# Altium PCB 地面站侧板开孔尺寸图1.PcbDoc
Units mm, origin at the board's own origin, x right, y up, seen from the top; angles counter-clockwise.
Board outline 168.25 x 54.25 mm, 2 copper layers (Top Layer, Bottom Layer); 18 components, 0 nets, 28 pads, 0 vias.
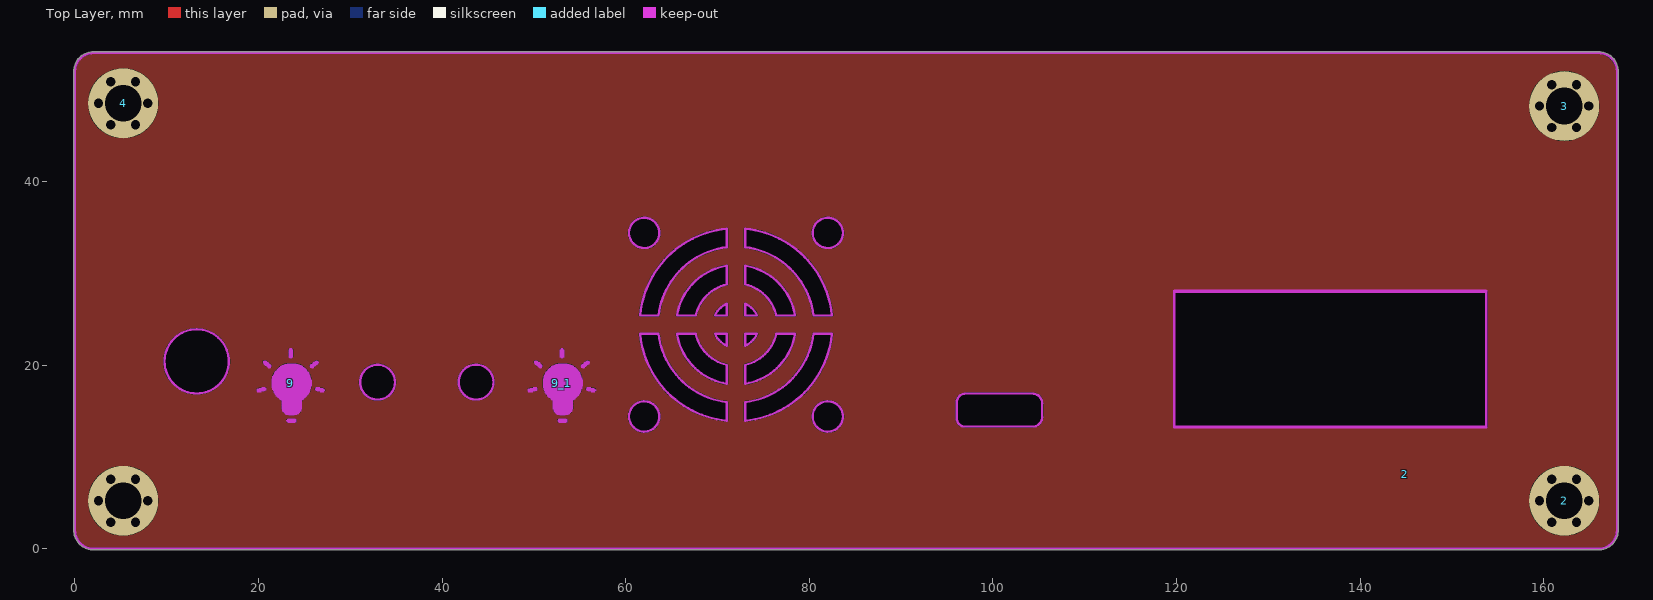
[diagram p0: Top Layer view]
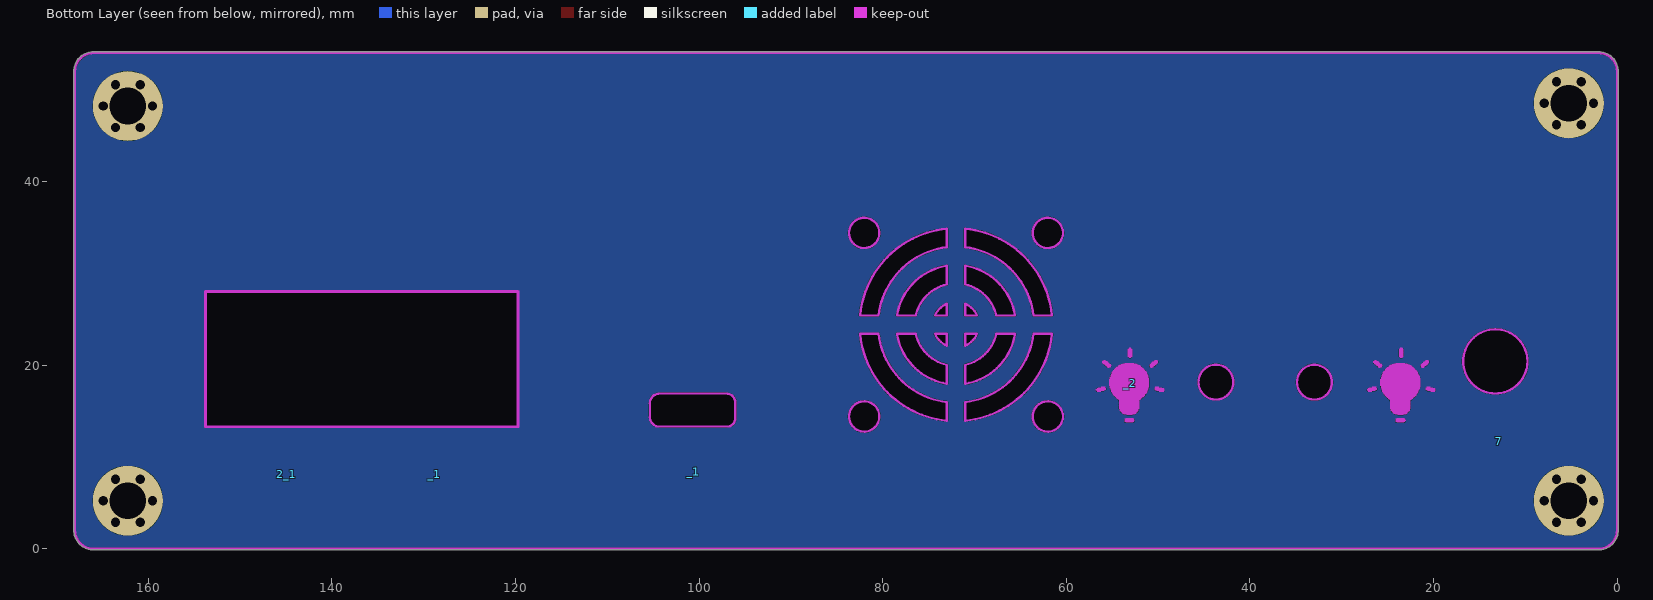
[diagram p1: Bottom Layer view, seen from below]

## Layer stack, top to bottom
Top Solder: solder mask 0.0102, Solder Resist, Dk 3.5
Top Layer: signal copper 0.0356
Dielectric 1: dielectric 0.32, FR-4, Dk 4.8
Bottom Layer: signal copper 0.0356
Bottom Solder: solder mask 0.0102, Solder Resist, Dk 3.5

## Board outline
-0.127,2 cw(c0,2) -0.125,2.022 -0.125,51.978 cw(c0,52) -0.127,52 cw(c2,52) 2,54.127 cw(c2,54) 2.022,54.125 165.977,54.125 cw(c166,54) 166,54.127 cw(c166,52) 168.127,52 cw(c168,52) 168.125,51.978 168.125,2.022 cw(c168,2) 168.127,2 cw(c166,2) 166,-0.127 cw(c166,0) 165.978,-0.125 2.022,-0.125 cw(c2,0) 2,-0.127 cw(c2,2)
cut-out: 60.365,14.4 ccw(c62.015,14.4) 62.015,12.75 ccw(c62.015,14.4) 63.665,14.4 ccw(c62.015,14.4) 62.015,16.05 ccw(c62.015,14.4)
cut-out: 60.365,14.4 ccw(c62.015,14.4) 62.015,12.75 ccw(c62.015,14.4) 63.665,14.4 ccw(c62.015,14.4) 62.015,16.05 ccw(c62.015,14.4)
cut-out: 65.592,23.4 ccw(c72.015,24.4) 71.015,17.977 71.015,20.013 cw(c72.015,24.4) 67.628,23.4
cut-out: 63.574,23.4 ccw(c72.015,24.4) 71.015,15.959 71.015,13.948 cw(c72.015,24.4) 61.563,23.4
cut-out: 71.015,22.109 71.015,23.4 69.724,23.4 ccw(c72.015,24.4)
cut-out: 73.015,22.109 ccw(c72.015,24.4) 74.306,23.4 73.015,23.4
cut-out: 73.015,17.977 ccw(c72.015,24.4) 78.438,23.4 76.402,23.4 cw(c72.015,24.4) 73.015,20.013
cut-out: 73.015,17.977 ccw(c72.015,24.4) 78.438,23.4 76.402,23.4 cw(c72.015,24.4) 73.015,20.013
cut-out: 73.015,15.959 ccw(c72.015,24.4) 80.456,23.4 82.467,23.4 cw(c72.015,24.4) 73.015,13.948
cut-out: 80.365,14.4 ccw(c82.015,14.4) 82.015,12.75 ccw(c82.015,14.4) 83.665,14.4 ccw(c82.015,14.4) 82.015,16.05 ccw(c82.015,14.4)
cut-out: 80.365,34.4 ccw(c82.015,34.4) 82.015,32.75 ccw(c82.015,34.4) 83.665,34.4 ccw(c82.015,34.4) 82.015,36.05 ccw(c82.015,34.4)
cut-out: 73.015,32.841 cw(c72.015,24.4) 80.456,25.4 82.467,25.4 ccw(c72.015,24.4) 73.015,34.852
cut-out: 73.015,30.823 cw(c72.015,24.4) 78.438,25.4 76.402,25.4 ccw(c72.015,24.4) 73.015,28.787
cut-out: 73.015,26.691 cw(c72.015,24.4) 74.306,25.4 73.015,25.4
cut-out: 60.365,34.4 ccw(c62.015,34.4) 62.015,32.75 ccw(c62.015,34.4) 63.665,34.4 ccw(c62.015,34.4) 62.015,36.05 ccw(c62.015,34.4)
cut-out: 61.563,25.4 cw(c72.015,24.4) 71.015,34.852 71.015,32.841 ccw(c72.015,24.4) 63.574,25.4
cut-out: 65.592,25.4 cw(c72.015,24.4) 71.015,30.823 71.015,28.787 ccw(c72.015,24.4) 67.628,25.4
cut-out: 69.724,25.4 cw(c72.015,24.4) 71.015,26.691 71.015,25.4
cut-out: 31.064,18.134 ccw(c32.964,18.134) 32.964,16.234 ccw(c32.964,18.134) 34.864,18.134 ccw(c32.964,18.134) 32.964,20.034 ccw(c32.964,18.134)
cut-out: 41.798,18.142 ccw(c43.698,18.142) 43.698,16.242 ccw(c43.698,18.142) 45.598,18.142 ccw(c43.698,18.142) 43.698,20.042 ccw(c43.698,18.142)
cut-out: 13.255,16.9 cw(c13.255,20.4) 9.755,20.4 cw(c13.255,20.4) 13.255,23.9 cw(c13.255,20.4) 16.755,20.4 cw(c13.255,20.4)
cut-out: 96.065,14.188 ccw(c96.953,14.188) 96.953,13.3 104.348,13.3 ccw(c104.348,14.317) 105.365,14.317 105.365,15.838 ccw(c104.303,15.838) 104.303,16.9 97.036,16.9 ccw(c97.036,15.929) 96.065,15.929
cut-out: 96.065,14.188 ccw(c96.953,14.188) 96.953,13.3 104.348,13.3 ccw(c104.348,14.317) 105.365,14.317 105.365,15.838 ccw(c104.303,15.838) 104.303,16.9 97.036,16.9 ccw(c97.036,15.929) 96.065,15.929
cut-out: 119.64,13.3 ccw(c119.765,13.3) 119.765,13.175 153.765,13.175 ccw(c153.765,13.3) 153.89,13.3 153.89,28 ccw(c153.765,28) 153.765,28.125 119.765,28.125 ccw(c119.765,28) 119.64,28

## Design rules (kind name [scope] priority, off if disabled: settings)
Clearance [All] p1: gap=0
ComponentClearance [All] p1: gap=0 collisioncheckmode=3 verticalgap=0 showdistances=FALSE
PolygonConnect [All] p1: connectstyle=Relief reliefconductorwidth=0.254 reliefentries=4 polygonreliefangle="90 Angle" airgapwidth=0.254
RoutingVias [All] p1: holewidth=0.711 width=1.27 viastyle="Through Hole" minholewidth=0.711 minwidth=1.27 maxholewidth=0.711 maxwidth=1.27
SolderMaskExpansion [All] p1: expansion=0.102
Width [All] p1: maxlimit=0.254 minlimit=0.254 preferedwidth=0.254
29 further rules are at their usual default settings.

## Components (designator, comment, footprint, x,y, rotation, side; value= is the part's Value field where it differs from the comment)
2 "" "M4 定位孔" 162.5,5.5 r0 top
2 "" LOGO_Display 144.9,8.1 r0 top
2_1 "" LOGO_Display 144.907,8.103 r0 bottom
3 "" "M4 定位孔" 162.5,48.5 r0 top
4 "" "M4 定位孔" 5.5,48.8 r0 top
7 "" LOGO_WIFI 12.903,11.684 r180 bottom
9 "" LOGO_LIGHT#1 23.47,17.996 r0 top
9_1 "" LOGO_LIGHT#1 53.01,17.996 r0 top
_1 "" LOGO_USB 100.584,8.382 r0 bottom
_1 "" LOGO_Display 128.803,8.103 r0 bottom
_2 "" LOGO_LIGHT#1 53.01,17.996 r0 bottom
? "" LOGO_LIGHT#2 53.01,17.996 r0 top
? "" LOGO_LIGHT#2 23.47,17.996 r0 top
? "" LOGO_LIGHT#1 23.47,17.996 r0 bottom
? "" LOGO_WIFI 13.564,11.684 r0 top
? "" "M4 定位孔" 5.5,5.5 r0 top
? "" LOGO_Display 128.8,8.1 r0 top
? "" LOGO_USB 100.575,8.388 r0 top

## Footprints (in the part's own frame and the unit in brackets; to place one, negate y for a bottom-side part, rotate by r counter-clockwise, add the part's x,y. Pads: shape width x height; smd on the part's side, far side on the other; paste and mask are expansions set on the pad)
LOGO_Display [mm]
LOGO_LIGHT#1 [mm]
LOGO_LIGHT#2 [mm]
  Keep-Out Layer lines w0.064: -3.67,-0.813 -2.845,-0.813 ; -3.67,-0.749 -2.718,-0.749 ; -3.67,-0.686 -2.654,-0.686 ; -3.67,-0.622 -2.654,-0.622 ; -3.607,-0.876 -3.162,-0.876 ; -3.607,-0.559 -2.654,-0.559 ; -3.416,-0.495 -2.654,-0.495 ; -3.099,-0.432 -2.718,-0.432 ; -2.972,2.235 -2.337,2.235 ; -2.972,2.299 -2.4,2.299 ; -2.972,2.362 -2.527,2.362 ; -2.972,2.426 -2.591,2.426 ; -2.908,2.172 -2.273,2.172 ; -2.908,2.489 -2.654,2.489 ; -2.845,2.108 -2.21,2.108 ; -2.781,2.045 -2.146,2.045 ; -2.718,1.981 -2.083,1.981 ; -2.654,1.918 -2.083,1.918 ; -2.527,1.854 -2.083,1.854 ; -2.464,1.791 -2.146,1.791 ; -2.4,1.727 -2.21,1.727 ; -2.019,-0.432 2.235,-0.432 ; -2.019,-0.368 2.235,-0.368 ; -2.019,-0.305 2.235,-0.305 ; -2.019,-0.241 2.299,-0.241 ; -2.019,-0.178 2.299,-0.178 ; -2.019,-0.114 2.299,-0.114 ; -2.019,-0.051 2.299,-0.051 ; -2.019,0.013 2.299,0.013 ; -2.019,0.076 2.299,0.076 ; -2.019,0.14 2.299,0.14 ; -2.019,0.203 2.299,0.203 ; -2.019,0.267 2.299,0.267 ; -2.019,0.33 2.299,0.33 ; -2.019,0.394 2.299,0.394 ; -2.019,0.457 2.235,0.457 ; -2.019,0.521 2.235,0.521 ; -1.956,-0.622 2.172,-0.622 ; -1.956,-0.559 2.172,-0.559 ; -1.956,-0.495 2.235,-0.495 ; -1.956,0.584 2.235,0.584 ; -1.956,0.648 2.235,0.648 ; -1.956,0.711 2.172,0.711 ; -1.956,0.775 2.172,0.775 ; -1.892,-0.749 2.108,-0.749 ; -1.892,-0.686 2.172,-0.686 ; -1.892,0.838 2.172,0.838 ; -1.892,0.902 2.108,0.902 ; -1.829,-0.94 2.045,-0.94 ; -1.829,-0.876 2.108,-0.876 ; -1.829,-0.813 2.108,-0.813 ; -1.829,0.965 2.108,0.965 ; -1.829,1.029 2.045,1.029 ; -1.765,-1.003 1.981,-1.003 ; -1.765,1.092 2.045,1.092 ; -1.765,1.156 2.045,1.156 ; -1.702,-1.13 1.918,-1.13 ; -1.702,-1.067 1.981,-1.067 ; -1.702,1.219 1.981,1.219 ; -1.702,1.283 1.918,1.283 ; -1.638,-1.194 1.918,-1.194 ; -1.638,1.346 1.854,1.346 ; -1.575,-1.321 1.791,-1.321 ; -1.575,-1.257 1.854,-1.257 ; -1.575,1.41 1.854,1.41 ; -1.511,-1.384 1.727,-1.384 ; -1.511,1.473 1.791,1.473 ; -1.448,-1.448 1.664,-1.448 ; -1.448,1.537 1.727,1.537 ; -1.384,-1.511 1.6,-1.511 ; -1.384,1.6 1.664,1.6 ; -1.321,1.664 1.6,1.664 ; -1.257,-1.575 1.537,-1.575 ; -1.257,1.727 1.537,1.727 ; -1.194,-1.638 1.473,-1.638 ; -1.194,1.791 1.473,1.791 ; -1.13,-1.702 1.41,-1.702 ; -1.13,1.854 1.346,1.854 ; -1.067,-1.765 1.283,-1.765 ; -1.003,1.918 1.283,1.918 ; -0.94,-2.781 1.219,-2.781 ; -0.94,-2.718 1.219,-2.718 ; -0.94,-2.654 1.219,-2.654 ; -0.94,-2.591 1.219,-2.591 ; -0.94,-2.527 1.219,-2.527 ; -0.94,-2.464 1.219,-2.464 ; -0.94,-2.4 1.219,-2.4 ; -0.94,-2.337 1.219,-2.337 ; -0.94,-2.273 1.219,-2.273 ; -0.94,-2.21 1.219,-2.21 ; -0.94,-2.146 1.219,-2.146 ; -0.94,-2.083 1.219,-2.083 ; -0.94,-2.019 1.219,-2.019 ; -0.94,-1.956 1.219,-1.956 ; -0.94,-1.892 1.219,-1.892 ; -0.94,-1.829 1.219,-1.829 ; -0.876,-2.972 1.156,-2.972 ; -0.876,-2.908 1.156,-2.908 ; -0.876,-2.845 1.156,-2.845 ; -0.876,1.981 1.156,1.981 ; -0.813,-3.035 1.092,-3.035 ; -0.749,-3.162 1.029,-3.162 ; -0.749,-3.099 1.029,-3.099 ; -0.749,2.045 1.029,2.045 ; -0.622,-3.226 0.902,-3.226 ; -0.622,2.108 0.838,2.108 ; -0.559,-3.289 0.838,-3.289 ; -0.495,-3.353 0.711,-3.353 ; -0.432,-4.051 0.648,-4.051 ; -0.432,-3.988 0.648,-3.988 ; -0.368,-4.178 0.648,-4.178 ; -0.368,-4.115 0.648,-4.115 ; -0.368,-3.924 0.648,-3.924 ; -0.368,2.172 0.648,2.172 ; -0.305,-3.861 0.521,-3.861 ; -0.241,-4.242 0.457,-4.242 ; -0.178,-3.416 0.394,-3.416 ; -0.178,2.934 0.267,2.934 ; -0.178,2.997 0.267,2.997 ; -0.178,3.061 0.267,3.061 ; -0.178,3.124 0.267,3.124 ; -0.178,3.188 0.267,3.188 ; -0.178,3.251 0.267,3.251 ; -0.178,3.315 0.267,3.315 ; -0.178,3.378 0.267,3.378 ; -0.178,3.442 0.267,3.442 ; -0.178,3.505 0.267,3.505 ; -0.178,3.569 0.267,3.569 ; -0.178,3.632 0.267,3.632 ; -0.178,3.696 0.267,3.696 ; -0.114,2.87 0.203,2.87 ; -0.114,3.759 0.203,3.759 ; -0.051,2.807 0.14,2.807 ; -0.051,3.823 0.14,3.823 ; 2.108,1.918 2.68,1.918 ; 2.172,1.791 2.553,1.791 ; 2.172,1.854 2.616,1.854 ; 2.172,1.981 2.743,1.981 ; 2.172,2.045 2.807,2.045 ; 2.235,2.108 2.934,2.108 ; 2.299,1.727 2.489,1.727 ; 2.362,2.172 2.997,2.172 ; 2.426,2.235 3.061,2.235 ; 2.489,2.299 3.061,2.299 ; 2.553,2.362 3.061,2.362 ; 2.68,-0.686 3.759,-0.686 ; 2.68,-0.622 3.696,-0.622 ; 2.68,-0.559 3.632,-0.559 ; 2.68,2.426 2.997,2.426 ; 2.743,-0.495 3.505,-0.495 ; 2.743,-0.432 3.188,-0.432 ; 2.743,2.489 2.934,2.489 ; 2.807,-0.749 3.759,-0.749 ; 2.934,-0.813 3.696,-0.813 ; 3.251,-0.876 3.632,-0.876
LOGO_USB [mm]
LOGO_WIFI [mm]
"M4 定位孔" [mil]
  round 40 hole 40: 1(-116,-11) 1(-63,-102.8) 1(-63,80.8) 1(43,-102.8) 1(43,80.8) 1(96,-11)
  round 300 hole 157.48: 1(-10,-11)

## Nets (pads, with @x,y where several pads share a name; then routed paths per layer and width w, separated by ;. In a path a pad name is that pad's centre, name@x,y a point inside that pad or via, vN(x,y) a via of type N, cw(c..) or ccw(c..) an arc to the next point about the centre after c; other vN are vias at no path point)
pads on no net: 2.1 3.1 4.1 ?.1

## Polygon pours and split planes (outlines as drawn)
no net on Bottom Layer "Top Layer-No Net" (solid, pour order 14): 0,51.994 cw(c2.006,51.994) 2.006,54 2.032,54 165.46,54 cw(c165.46,51.46) 168,51.46 168,2 cw(c166,2) 166,0 2.057,0 cw(c2.057,2.057) 0,2.057
no net on Top Layer "Top Layer-No Net" (solid, pour order 16): 0,52 cw(c2,52) 2,54 165.46,54 cw(c165.46,51.46) 168,51.46 168,2 cw(c166,2) 166,0 2,0 cw(c2,2) 0,2

## Keep-outs
Keep-Out Layer:
  circle w0.25: c62.015,34.4 r1.65
  circle w0.25: c82.015,34.4 r1.65
  circle w0.25: c43.698,18.142 r1.9
  circle w0.25: c62.015,14.4 r1.65
  circle w0.25: c82.015,14.4 r1.65
  circle w0.25: c32.964,18.134 r1.9
  circle w0.25: c13.255,20.4 r3.5
  lines w0.25: 2,0 166,0 ; 2,54 166,54 ; 96.065,14.188 96.065,15.929 ; 96.953,13.3 104.348,13.3 ; 97.036,16.9 104.303,16.9 ; 105.365,14.317 105.365,15.838 ; 119.915,13.3 153.615,13.3 153.765,13.3 ; 168,2 168,52 ; 153.765,13.3 153.765,27.3 153.765,28 119.765,28 119.765,27.3 119.765,13.3 153.765,13.3 ; 0,2 0,11.8 0,52 0,2 ; 61.563,23.4 ccw(c72.015,24.4) 71.015,13.948 71.015,15.959 cw(c72.015,24.4) 63.574,23.4 61.563,23.4 ; 61.563,25.4 cw(c72.015,24.4) 71.015,34.852 71.015,32.841 ccw(c72.015,24.4) 63.574,25.4 61.563,25.4 ; 65.592,23.4 ccw(c72.015,24.4) 71.015,17.977 71.015,20.013 cw(c72.015,24.4) 67.628,23.4 65.592,23.4 ; 65.592,25.4 cw(c72.015,24.4) 71.015,30.823 71.015,28.787 ccw(c72.015,24.4) 67.628,25.4 65.592,25.4 ; 69.724,23.4 ccw(c72.015,24.4) 71.015,22.109 71.015,23.4 69.724,23.4 ; 69.724,25.4 cw(c72.015,24.4) 71.015,26.691 71.015,25.4 69.724,25.4 ; 73.015,13.948 ccw(c72.015,24.4) 82.467,23.4 80.456,23.4 cw(c72.015,24.4) 73.015,15.959 73.015,13.948 ; 73.015,17.977 ccw(c72.015,24.4) 78.438,23.4 76.402,23.4 cw(c72.015,24.4) 73.015,20.013 73.015,17.977 ; 73.015,22.109 ccw(c72.015,24.4) 74.306,23.4 73.015,23.4 73.015,22.109 ; 73.015,25.4 73.015,26.691 cw(c72.015,24.4) 74.306,25.4 73.015,25.4 ; 73.015,28.787 cw(c72.015,24.4) 76.402,25.4 78.438,25.4 ccw(c72.015,24.4) 73.015,30.823 73.015,28.787 ; 73.015,32.841 cw(c72.015,24.4) 80.456,25.4 82.467,25.4 ccw(c72.015,24.4) 73.015,34.852 73.015,32.841
  lines w0.254: 0,2 ccw(c2,2) 2,0 ; 0,52 cw(c2,52) 2,54 ; 96.065,14.188 ccw(c96.953,14.188) 96.953,13.3 ; 96.065,15.929 cw(c97.036,15.929) 97.036,16.9 ; 104.303,16.9 cw(c104.303,15.838) 105.365,15.838 ; 104.348,13.3 ccw(c104.348,14.317) 105.365,14.317 ; 166,0 ccw(c166,2) 168,2 ; 166,54 cw(c166,52) 168,52

## Silkscreen, mask and mechanical layers (free items; w line width, h text height)
Top Solder:
  text "FX" at 22.301,10.389 h3
  text "RBT" at 30.734,10.389 h3
  text "WIFI" at 50.622,10.389 h3
  text "RST" at 41.504,10.364 h3
Bottom Solder:
  text "FX" at 24.994,10.363 h3
  text "RBT" at 35.052,10.363 h3
  text "WIFI" at 56.413,10.363 h3
  text "RST" at 45.796,10.338 h3